# EAGLE board EC544 (EAGLE 9.6.2)
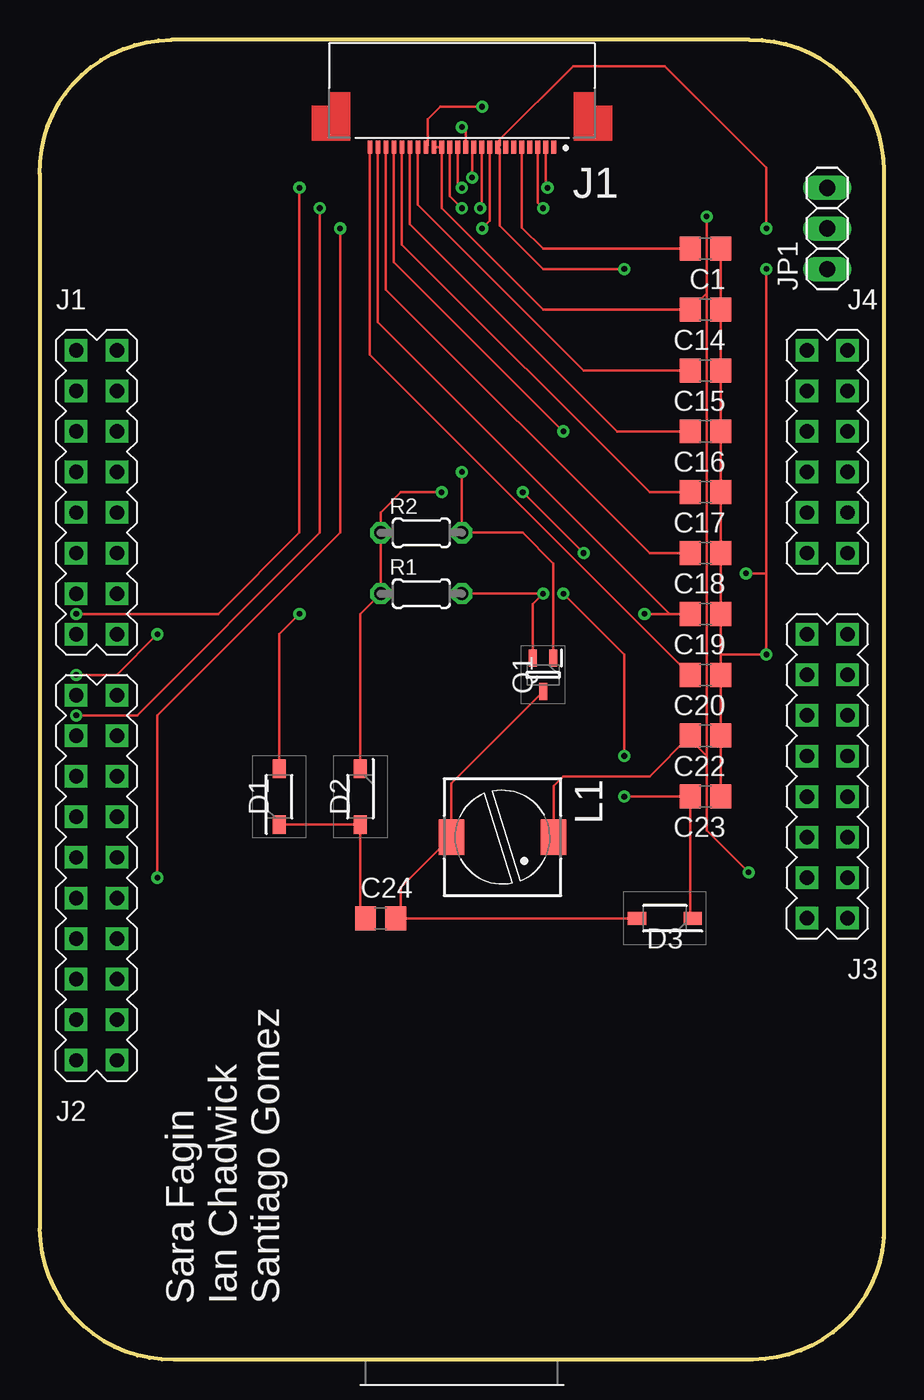
[diagram p0: board, top side]
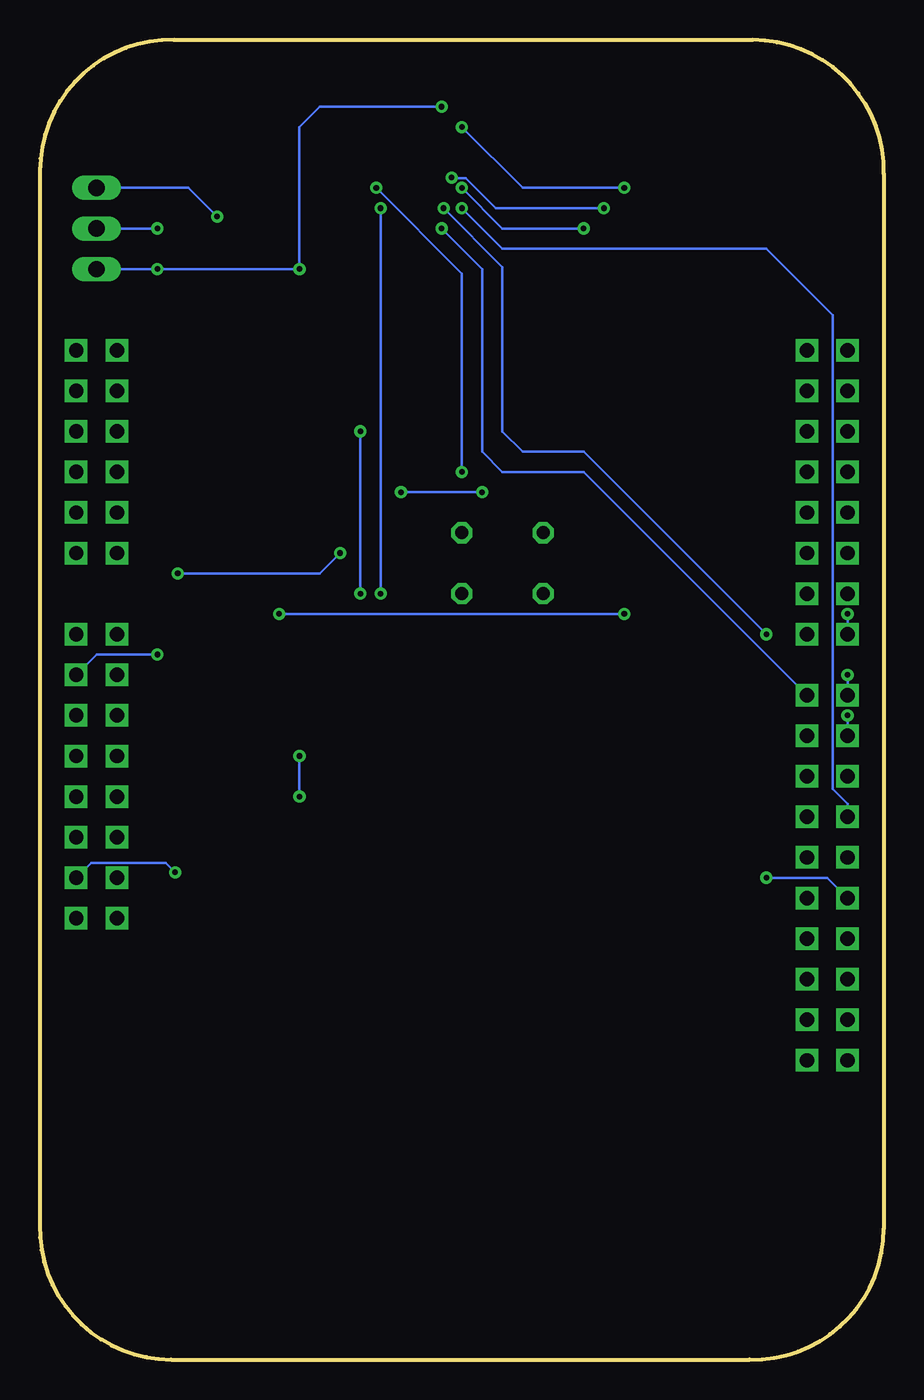
[diagram p1: board, bottom side, seen from below]

Size 52.8 x 82.6 mm. Coordinates in mm from the lower left corner, seen from the top.
Copper layers (1*16): Top 0.035mm / dielectric 1.5mm / Bottom 0.035mm
Design rules "default": minimum track width 6mil, minimum drill 0.35mm, track to track 6mil, track to pad 6mil, pad to pad 6mil, via to via 6mil, smd to smd 6mil, copper to edge 40mil, drill to drill 6mil, minimum pad ring 10mil, minimum via ring 8mil, stop-mask expansion 4mil, vias tented up to drill 0mil, thermal gap 10mil

## Footprints (pad centres in the part's own frame; a part is rotated, then mirrored left to right if it is on the bottom)
C0805 = smd 1.3 x 1.5: 1 -0.95,0; 2 0.95,0
SOD3716X135N = smd 1.15 x 0.8: 1 -1.75,0; 2 1.75,0
FRDM_K64F = drill 0.9 square: J1.1 -21.59,17.78; J1.2 -24.13,17.78; J1.3 -21.59,15.24; J1.4 -24.13,15.24; J1.5 -21.59,12.7; J1.6 -24.13,12.7; J1.7 -21.59,10.16; J1.8 -24.13,10.16; J1.9 -21.59,7.62; J1.10 -24.13,7.62; J1.11 -21.59,5.08; J1.12 -24.13,5.08; J1.13 -21.59,2.54; J1.14 -24.13,2.54; J1.15 -21.59,0; J1.16 -24.13,0; J2.1 -21.59,-3.81; J2.2 -24.13,-3.81; J2.3 -21.59,-6.35; J2.4 -24.13,-6.35; J2.5 -21.59,-8.89; J2.6 -24.13,-8.89; J2.7 -21.59,-11.43; J2.8 -24.13,-11.43; J2.9 -21.59,-13.97; J2.10 -24.13,-13.97; J2.11 -21.59,-16.51; J2.12 -24.13,-16.51; J2.13 -21.59,-19.05; J2.14 -24.13,-19.05; J2.15 -21.59,-21.59; J2.16 -24.13,-21.59; J2.17 -21.59,-24.13; J2.18 -24.13,-24.13; J2.19 -21.59,-26.67; J2.20 -24.13,-26.67; J3.1 21.59,-17.78; J3.2 24.13,-17.78; J3.3 21.59,-15.24; J3.4 24.13,-15.24; J3.5 21.59,-12.7; J3.6 24.13,-12.7; J3.7 21.59,-10.16; J3.8 24.13,-10.16; J3.9 21.59,-7.62; J3.10 24.13,-7.62; J3.11 21.59,-5.08; J3.12 24.13,-5.08; J3.13 21.59,-2.54; J3.14 24.13,-2.54; J3.15 21.59,0; J3.16 24.13,0; J4.1 21.59,5.08; J4.2 24.13,5.08; J4.3 21.59,7.62; J4.4 24.13,7.62; J4.5 21.59,10.16; J4.6 24.13,10.16; J4.7 21.59,12.7; J4.8 24.13,12.7; J4.9 21.59,15.24; J4.10 24.13,15.24; J4.11 21.59,17.78; J4.12 24.13,17.78
MOLEX_52435-2471 = smd 0.3 x 0.8: 1 -5.75,0; 2 -5.25,0; 3 -4.75,0; 4 -4.25,0; 5 -3.75,0; 6 -3.25,0; 7 -2.75,0; 8 -2.25,0; 9 -1.75,0; 10 -1.25,0; 11 -0.75,0; 12 -0.25,0; 13 0.25,0; 14 0.75,0; 15 1.25,0; 16 1.75,0; 17 2.25,0; 18 2.75,0; 19 3.25,0; 20 3.75,0; 21 4.25,0; 22 4.75,0; 23 5.25,0; 24 5.75,0
1X03 = drill 1.016 long: 1 -2.54,0; 2 0,0; 3 2.54,0
PIS2816 = smd 2.2 x 1.6: 1 0,3.2; 2 0,-3.2
SOT65P210X110-3N = smd 1.05 x 0.5: 1 -1.05,0.65; 2 -1.05,-0.65; 3 1.05,0
0204/5 = drill 0.813 octagon: 1 -2.54,0; 2 2.54,0

## Placement (x,y rotation side)
C1  [C0805]  41.64,69.53 180 top
C14  [C0805]  41.64,65.72 180 top
C15  [C0805]  41.64,61.91 180 top
C16  [C0805]  41.64,58.1 180 top
C17  [C0805]  41.64,54.29 180 top
C18  [C0805]  41.64,50.48 180 top
C19  [C0805]  41.64,46.67 180 top
C20  [C0805]  41.64,42.86 180 top
C22  [C0805]  41.64,39.05 180 top
C23  [C0805]  41.64,35.24 180 top
C24  [C0805]  21.32,27.62 0 top
D1  MBR0530  [SOD3716X135N]  14.97,35.24 90 top
D2  MBR0530  [SOD3716X135N]  20.05,35.24 270 top
D3  MBR0530  [SOD3716X135N]  39.1,27.62 180 top
FRDM1  [FRDM_K64F]  26.4,45.4 0 top
J1  52435-2471  [MOLEX_52435-2471]  26.4,75.88 180 top
JP1  [1X03]  49.26,70.8 90 top
L1  [PIS2816]  28.94,32.7 270 top
Q1  SI1308EDL-T1-GE3  [SOT65P210X110-3N]  31.48,42.86 270 top
R1  [0204/5]  23.86,47.94 0 top
R2  [0204/5]  23.86,51.75 0 top

## Library data of the parts
C1 C14-C20 C22-C24 = rcl; SPICEPREFIX: C
D1-D3 = MBR0530; ARROW_PART_NUMBER: MBR0530; ARROW_PRICE-STOCK: https://www.arrow.com/en/products/mbr0530/on-semiconductor?region=nac; DESCRIPTION: ON SEMICONDUCTOR - MBR0530 - DIODE, SCHOTTKY, 0.5A, 30V, SOD-123; HEIGHT: 1.35mm; MANUFACTURER_NAME: ON Semiconductor; MANUFACTURER_PART_NUMBER: MBR0530; MOUSER_PART_NUMBER: 512-MBR0530; MOUSER_PRICE-STOCK: https://www.mouser.co.uk/ProductDetail/ON-Semiconductor-Fairchild/MBR0530?qs=VOMQJJE%252BBNniwJKcE3T43Q%3D%3D
FRDM1 = Freedom
J1 = 52435-2471; AVAILABILITY: In Stock; DESCRIPTION: 24 Position FFC, FPC Connector Contacts, Top 0.020 (0.50mm) Surface Mount, Right Angle; MF: Molex; MP: 52435-2471; PACKAGE: None; PRICE: None; PURCHASE-URL: https://pricing.snapeda.com/search/part/52435-2471/?ref=eda
JP1 = pinhead
L1 = rcl; SPICEPREFIX: L
Q1 = Si1308EDL-T1-GE3; ARROW_PART_NUMBER: SI1308EDL-T1-GE3; ARROW_PRICE-STOCK: https://www.arrow.com/en/products/si1308edl-t1-ge3/vishay?region=nac; DESCRIPTION: MOSFET N-Ch 30V 1.5A TrenchFET SC70 Vishay Si1308EDL-T1-GE3 N-channel MOSFET Transistor, 1.5 A, 30 V, 3-Pin SC-70; HEIGHT: 1.1mm; MANUFACTURER_NAME: Vishay; MANUFACTURER_PART_NUMBER: Si1308EDL-T1-GE3; MOUSER_PART_NUMBER: 78-SI1308EDL-T1-GE3; MOUSER_PRICE-STOCK: https://www.mouser.co.uk/ProductDetail/Vishay-Semiconductors/SI1308EDL-T1-GE3?qs=bX1%252BNvsK%2FBramh9tgpOaEw%3D%3D
R1 R2 = rcl; SPICEPREFIX: R

## Nets
0: C1.1 C14.1 C15.1 C16.1 C17.1 C18.1 C19.1 C20.1 C22.1 C23.1 D2.1 FRDM1.J3.14 J1.8 J1.17 JP1.1 JP1.2 R1.1 R2.1
N$1: C1.2 J1.5
N$3: C24.1 D1.1 D2.2
N$4: C15.2 J1.18
N$5: C17.2 J1.20
N$6: C18.2 J1.22
N$7: C19.2 D1.2 J1.23
N$8: C20.2 J1.24
N$9: C24.2 D3.2 L1.2 Q1.3
N$10: C23.2 D3.1 J1.21
N$11: J1.2 Q1.1 R2.2
N$12: J1.3 Q1.2 R1.2
N$13: C16.2 J1.19
N$14: FRDM1.J2.1 J1.9
N$16: FRDM1.J2.2 J1.10
N$17: FRDM1.J2.4 J1.11
N$18: FRDM1.J1.16 J1.12
N$19: FRDM1.J2.12 J1.13
N$20: FRDM1.J2.8 J1.14
VCC: C14.2 C22.2 FRDM1.J3.4 J1.15 J1.16 JP1.3 L1.1

## Tracks (layer width: path | path; a pad name or v marks a point on that pad's centre or on a via)
0  (via drill 0.35)
  Top 0.152: C1.1 C14.1 C15.1 C16.1 C17.1 C18.1 C19.1 42.59,44.13 | 42.59,44.13 C20.1 C22.1 C23.1 | 42.59,44.13 v45.45,44.13 45.45,49.21 | v36.56,68.26 31.48,68.26 28.77,70.97 28.77,75.76 J1.8 | v45.45,68.26 45.45,49.21 | D2.1 20.05,46.67 R1.1 R2.1 21.32,53.02 22.59,54.29 v25.13,54.29 | v30.21,54.29 v34.02,50.48 | v44.18,49.21 45.45,49.21 | 28.65,75.51 J1.8 | 27.75,78.42 v27.67,78.42 25.05,78.42 24.27,77.65 24.27,76 J1.17 | J1.8 28.77,76 28.77,76.38 33.36,80.96 39.1,80.96 45.45,74.61 v45.45,70.8
  Bottom 0.152: v25.13,54.29 v30.21,54.29 | v34.02,50.48 35.29,49.21 v44.18,49.21 | v45.45,44.13 49.26,44.13 FRDM1.J3.14 | v27.67,78.42 35.29,78.42 36.56,77.15 v36.56,68.26 v45.45,68.26 JP1.1 | JP1.2 v45.45,70.8
N$1
  Top 0.152: C1.2 31.48,69.53 30.15,70.86 J1.5
N$3
  Top 0.152: C24.1 20.05,27.94 D2.2 D1.1
N$4
  Top 0.152: C15.2 34.02,61.91 23.65,72.28 J1.18
N$5
  Top 0.152: C17.2 38.15,54.29 22.65,69.79 J1.20
N$6
  Top 0.152: C18.2 38.15,50.48 21.65,66.98 J1.22
N$7  (via drill 0.35)
  Top 0.152: C19.2 39.42,46.67 | 39.42,46.67 21.15,64.94 J1.23 | D1.2 14.97,45.4 v16.24,46.67 | v37.83,46.67 39.42,46.67
  Bottom 0.152: v16.24,46.67 v37.83,46.67
N$8
  Top 0.152: C20.2 20.65,62.9 J1.24
N$9
  Top 0.152: Q1.3 25.74,36.07 L1.2 22.59,29.55 22.59,27.62 | C24.2 22.59,27.62 | 22.59,27.62 D3.2
N$10  (via drill 0.35)
  Top 0.152: D3.1 40.69,27.63 C23.2 v36.56,35.24 | J1.21 22.15,68.7 v32.75,58.1 | v32.75,47.94 36.56,44.13 v36.56,37.78
  Bottom 0.152: v32.75,58.1 v32.75,47.94 | v36.56,37.78 v36.56,35.24
N$11  (via drill 0.35)
  Top 0.152: Q1.1 32.13,49.83 30.21,51.75 R2.2 v26.4,55.56 | v31.76,73.34 31.65,73.45 J1.2
  Bottom 0.152: v31.76,73.34 26.4,67.98 v26.4,55.56
N$12  (via drill 0.35)
  Top 0.152: J1.3 31.15,72.4 v31.48,72.07 | Q1.2 30.83,47.29 v31.48,47.94 R1.2
  Bottom 0.152: v31.48,72.07 v31.48,47.94
N$13
  Top 0.152: C16.2 36.13,58.1 23.15,71.08 J1.19
N$14  (via drill 0.35)
  Top 0.152: v27.67,70.8 28.15,71.28 J1.9
  Bottom 0.152: v27.67,70.8 25.13,68.26 25.13,56.83 23.86,55.56 18.78,55.56 FRDM1.J2.1
N$16  (via drill 0.35)
  Top 0.152: 27.67,75.86 J1.10 27.65,72.18 v27.54,72.07 | v7.35,45.4 4.81,42.86 v2.27,42.86
  Bottom 0.152: v27.54,72.07 23.86,68.39 23.86,58.1 22.59,56.83 18.78,56.83 v7.35,45.4 | v2.27,42.86 FRDM1.J2.2
N$17  (via drill 0.35)
  Top 0.152: v2.27,40.32 6.08,40.32 17.51,51.75 v17.51,72.07 | v27.04,73.98 27.04,75.77 J1.11
  Bottom 0.152: FRDM1.J2.4 v2.27,40.32 | v17.51,72.07 24.27,72.07 26.15,73.95 27.06,73.95 27.06,73.96 v27.04,73.98
N$18  (via drill 0.35)
  Top 0.152: J1.12 26.65,76.9 v26.4,77.15 | v16.24,73.34 16.24,51.75 11.16,46.67 v2.27,46.67
  Bottom 0.152: v26.4,77.15 22.59,73.34 v16.24,73.34 | v2.27,46.67 FRDM1.J1.16
N$19  (via drill 0.35)
  Top 0.152: J1.13 26.15,73.59 v26.4,73.34 | v18.78,70.8 18.78,51.75 7.35,40.32 v7.35,30.16
  Bottom 0.152: v26.4,73.34 23.86,70.8 v18.78,70.8 | v7.35,30.16 3.54,30.16 FRDM1.J2.12
N$20  (via drill 0.35)
  Top 0.152: J1.14 25.65,72.82 v26.4,72.07
  Bottom 0.152: v26.4,72.07 23.86,69.53 7.35,69.53 3.2,65.38 3.2,35.71 2.27,34.78 FRDM1.J2.8
VCC  (via drill 0.35)
  Top 0.152: 25.13,75.86 25.13,72.07 31.48,65.72 C14.2 41.71,66.74 | 25.13,75.86 J1.15 | J1.16 25.11,75.88 25.13,75.86 | 41.71,66.74 v41.71,71.54 | 41.71,37.78 41.71,33.12 v44.34,30.5 | 41.71,37.78 41.71,66.74 | 41.71,37.78 40.69,38.8 C22.2 38.15,36.51 32.75,36.51 32.14,35.9 L1.1
  Bottom 0.152: v44.34,30.5 44.93,31.09 49.6,31.09 FRDM1.J3.4 | v41.71,71.54 43.51,73.34 JP1.3

## Text on the board
tPlace: Sara Fagin / Ian Chadwick / Santiago Gomez